# EAGLE board hub_small (EAGLE 9.6.2)
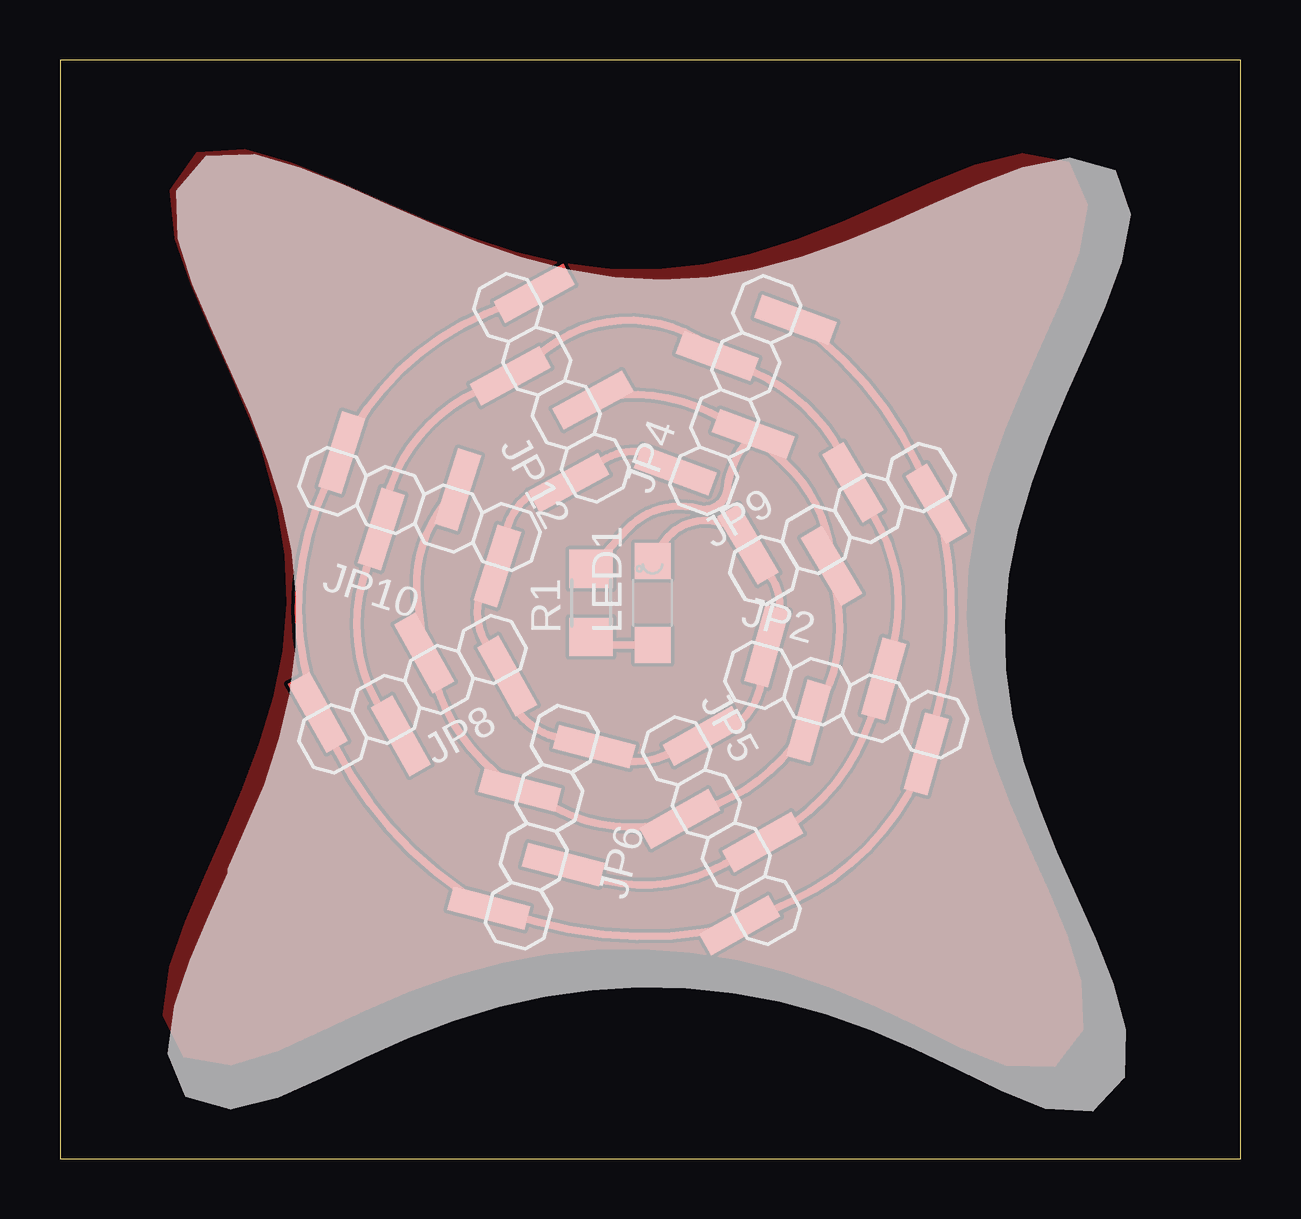
[diagram p0: board, top side]

Size 49.2 x 45.8 mm. Coordinates in mm from the lower left corner, seen from the top.
Outline: 0,0 49.2,0 49.2,45.8 0,45.8 0,0
Copper layers (1*16): Top 0.035mm / dielectric 1.5mm / Bottom 0.035mm
Design rules "default": minimum track width 6mil, minimum drill 0.35mm, track to track 6mil, track to pad 6mil, pad to pad 6mil, via to via 6mil, smd to smd 6mil, copper to edge 40mil, drill to drill 6mil, minimum pad ring 10mil, minimum via ring 8mil, stop-mask expansion 4mil, vias tented up to drill 0mil, thermal gap 10mil

## Footprints (pad centres in the part's own frame; a part is rotated, then mirrored left to right if it is on the bottom)
1X04SMD = smd 1.016 x 3.302: 1 -1.27,1.27; 2 1.27,-1.27; 3 3.81,1.27; 4 6.35,-1.27
CHIPLED_1206 = smd 1.5 x 1.5: A 0,-1.75; C 0,1.75
R1206 = smd 1.6 x 1.803: 1 -1.422,0; 2 1.422,0

## Placement (x,y rotation side)
JP2  [1X04SMD]  30.32,19.81 344.3 top
JP4  [1X04SMD]  27.26,29.45 69.8 top
JP5  [1X04SMD]  26.31,15.89 299.4 top
JP6  [1X04SMD]  20.71,16.27 255.3 top
JP8  [1X04SMD]  16.9,20.6 209.3 top
JP9  [1X04SMD]  30.41,25.16 30.6 top
JP10  [1X04SMD]  17.4,26.3 162.3 top
JP12  [1X04SMD]  21.7,29.9 118.7 top
LED1  [CHIPLED_1206]  24.69,23.17 0 top
R1  [R1206]  22.13,23.17 90 top

## Library data of the parts
JP2 JP4-JP6 JP8-JP10 JP12 = pinhead-2
LED1 = led
R1 = rcl; SPICEPREFIX: R

## Nets
GND: JP2.1 JP4.1 JP5.1 JP6.1 JP8.1 JP9.1 JP10.1 JP12.1 LED1.C
N$2: JP2.4 JP4.4 JP5.4 JP6.4 JP8.4 JP9.4 JP10.4 JP12.4
N$3: LED1.A R1.1
N$5: JP2.3 JP4.3 JP5.3 JP6.3 JP8.3 JP9.3 JP10.3 JP12.3
VCC: JP2.2 JP4.2 JP5.2 JP6.2 JP8.2 JP9.2 JP10.2 JP12.2 R1.2

## Tracks (layer width: path | path; a pad name or v marks a point on that pad's centre or on a via)
GND
  Top 0.305: LED1.C 25.1,25.6 arc-118 JP9.1 29.6,24.3 arc-71 29.6,21.9 arc37 JP2.1 29.2,19.8 arc-69 27.16,17.62 | JP5.1 25.4,16.9 arc-64 22.12,17.18 | JP6.1 20.6,17.6 arc-75 JP8.1 17.8,21.4 arc-80 JP10.1 18.6,26.2 arc-77 JP12.1 22.6,29.1 arc-75 25.37,28.9
  Top 0.406: JP12.1 21.78,28.18 | 25.37,28.9 JP4.1 | 28.53,25.94 JP9.1 | 27.16,17.62 JP5.1 | 22.12,17.18 JP6.1 | JP8.1 18.37,20.2
N$1
  pour Top: 42.42,37.79 42.78,39.75 42.02,41.52 40.09,41.87 38.14,41.39 36.28,40.65 34.45,39.83 32.61,39.03 30.74,38.3 28.83,37.69 26.87,37.25 24.88,37.03 22.87,37.05 20.89,37.31 18.93,37.77 17.03,38.39 15.16,39.12 13.32,39.92 11.49,40.73 9.63,41.48 7.7,42.03 5.72,41.92 4.62,40.36 4.82,38.37 5.48,36.48 6.29,34.64 7.12,32.82 8.37,29.87 9.1,27.15 9.42,25.17 9.49,23.16 9.32,21.17 8.92,19.2 8.35,17.28 7.65,15.4 6.86,13.56 6.04,11.72 5.25,9.88 4.6,7.99 4.33,6.01 5.19,4.27 7.11,3.93 9.03,4.51 10.85,5.35 12.67,6.2 14.51,6.99 16.4,7.66 18.34,8.19 20.31,8.55 22.3,8.75 24.31,8.77 26.31,8.62 28.29,8.3 30.24,7.82 32.14,7.17 33.99,6.4 35.8,5.54 37.6,4.65 39.46,3.91 41.43,3.86 42.6,5.38 42.51,7.37 41.92,9.29 41.15,11.14 40.33,12.97 39.54,14.81 38.83,16.69 38.25,18.61 37.87,20.58 37.72,22.58 37.81,24.58 38.14,26.56 38.66,28.5 39.32,30.39 40.09,32.24 40.91,34.07 41.71,35.91
N$2
  Top 0.305: JP12.4 17.7,35.2 arc42 JP10.4 11.1,28.1 arc46 JP8.4 11.5,17.1 arc34 JP6.4 19.8,9.9 arc30 JP5.4 30.6,10.8 arc46 JP2.4 36.6,18.8 arc31 JP9.4 35.7,29 arc29 JP4.4
N$3
  Top 0.152: 22.45,21.85 arc-90 22.9,21.4
  Top 0.305: 22.45,21.85 arc-90 22.9,21.4 arc90 22.45,21.85 | R1.1 22.5,21.75 | 22.45,21.85 22.4,21.85 arc90 22.5,21.75 | LED1.A 22.83,21.42 22.5,21.75
N$5
  Top 0.305: 27.42,33.58 arc78 20.3,33.8 JP12.3 17.4,32 arc60 JP10.3 12.8,24.7 arc64 JP8.3 | JP4.3 28.9,32.8 arc-49 JP9.3 33.9,26.8 arc-52 34.5,20.7 arc14 JP2.3 33.8,18.4 arc-45 JP5.3 27.7,12.3 arc-58 JP6.3
  Top 0.406: JP4.3 27.42,33.58
VCC
  Top 0.305: R1.2 23.62,26.24 arc-63 26.6,27.1 arc98 27.8,27.9 arc-36 JP4.2 | JP4.2 30.2,29 arc-46 JP9.2 32.4,23.2 arc-46 JP2.2 arc-40 27.4,14.8 JP5.2 arc-45 20.9,14.5 JP6.2 arc-39 15.8,19.4 JP8.2 14.9,23.3 arc-54 JP10.2 | JP4.2 27.1,31.1 arc41 JP12.2
  Top 0.406: JP9.2 31.9,24.5